# Altium PCB Preamp.PcbDoc
Units mil, origin at the board's own origin, x right, y up, seen from the top; angles counter-clockwise.
Board outline 1250 x 480 mil, 2 copper layers (Top Layer, Bottom Layer); 15 components, 14 nets, 56 pads, 55 vias.
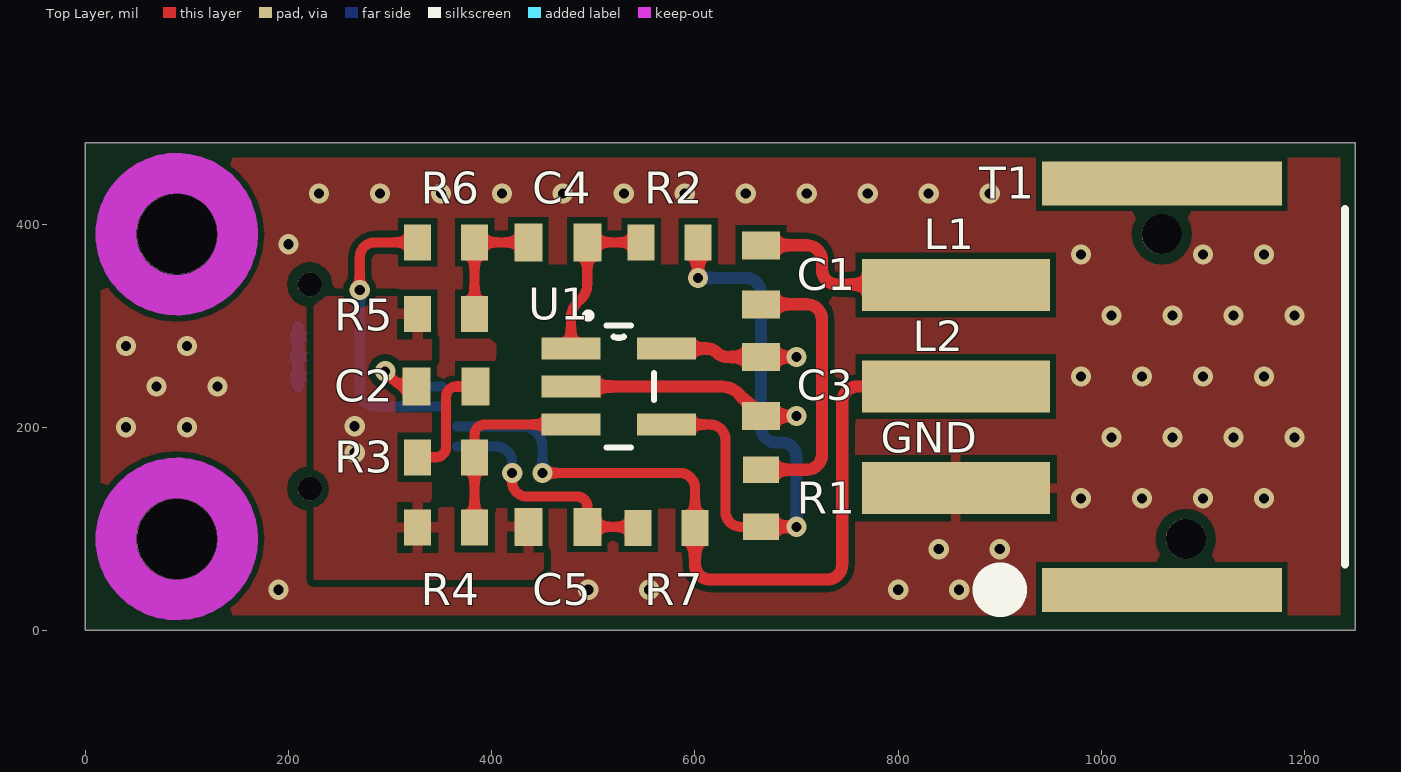
[diagram p0: Top Layer view]
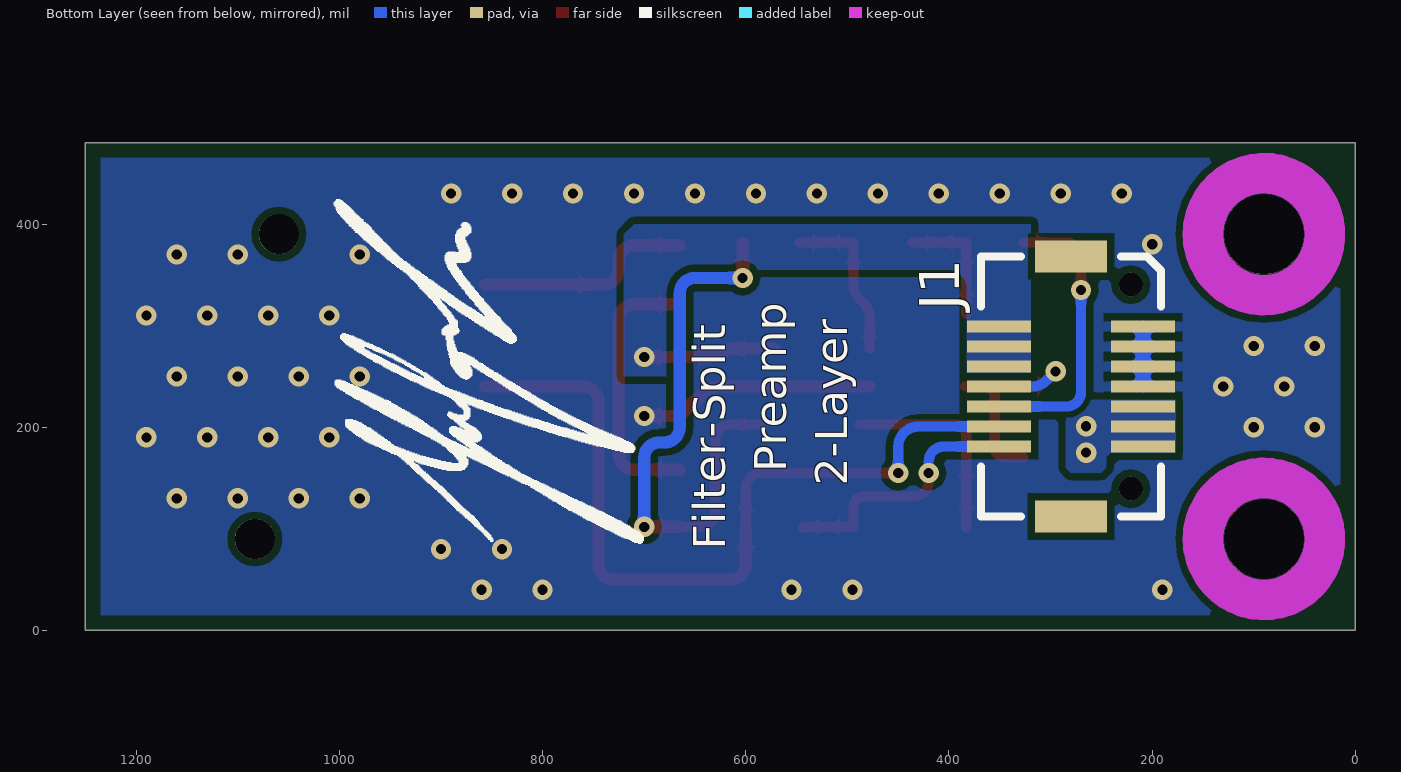
[diagram p1: Bottom Layer view, seen from below]
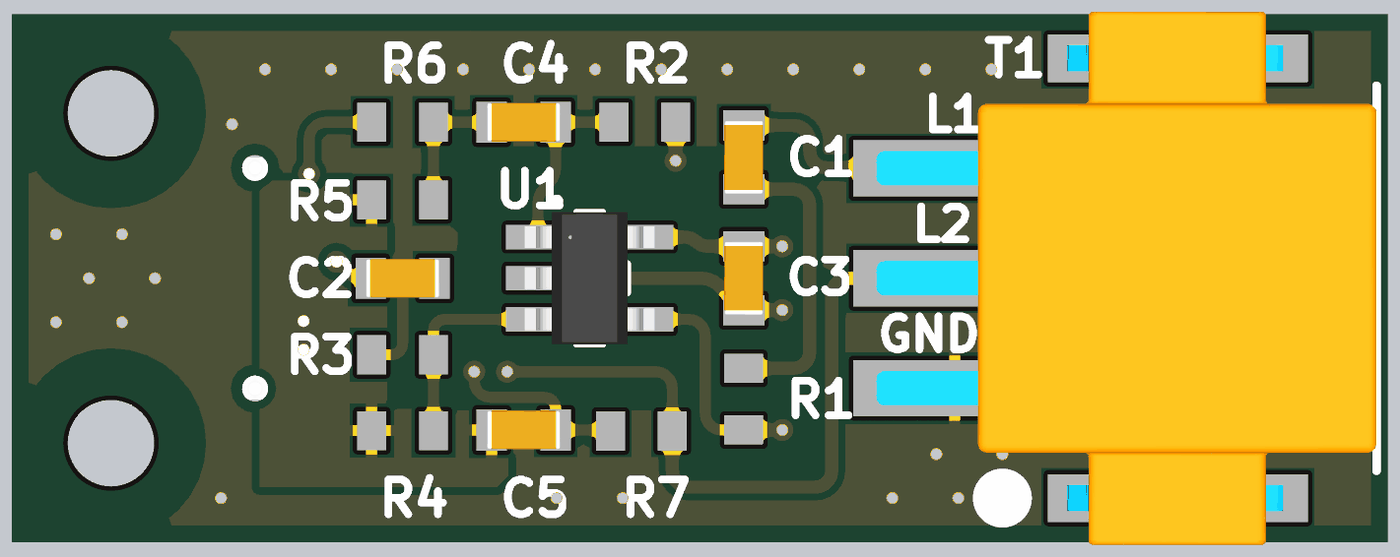
[diagram p2: 3D render of the assembled board from above, using the file's embedded part models]

## Layer stack, top to bottom
Top Solder: solder mask 0.4, Solder Resist, Dk 3.5
Top Layer: signal copper 1.4
Dielectric 1: dielectric 12.6, FR-4, Dk 4.8
Bottom Layer: signal copper 1.4
Bottom Solder: solder mask 0.4, Solder Resist, Dk 3.5

## Board outline
0,0 1250,0 1250,480 0,480

## Design rules (kind name [scope] priority, off if disabled: settings)
Clearance Clearance_3 [InNamedPolygon('BOTTOM_GND')] p1: gap=7 ignorepadtopadclearanceinfootprint=FALSE except(0: Arc-Hole Track-Hole SMDPad-Hole THPad-Hole Via-Hole Fill-Hole Poly-Hole Region-Hole Text-Hole)
Clearance Clearance_2 [InNamedPolygon('BOTTOM_V+')] p2: gap=7 ignorepadtopadclearanceinfootprint=FALSE except(0: Arc-Hole Track-Hole SMDPad-Hole THPad-Hole Via-Hole Fill-Hole Poly-Hole Region-Hole Text-Hole)
Clearance Clearance_1 [InNamedPolygon('TOP_VREF')] p3: gap=10 ignorepadtopadclearanceinfootprint=FALSE except(0: Arc-Hole Track-Hole SMDPad-Hole THPad-Hole Via-Hole Fill-Hole Poly-Hole Region-Hole Text-Hole; 7: Arc-Fill Arc-Poly Arc-Region Track-Fill Track-Poly Track-Region SMDPad-Fill SMDPad-Poly SMDPad-Region THPad-Fill THPad-Poly THPad-Region Via-Fill Via-Poly Via-Region Fill-Fill Fill-Poly Fill-Region Poly-Poly Poly-Region Region-Region)
Clearance [All] p4: gap=6 ignorepadtopadclearanceinfootprint=FALSE except(0: Arc-Text Arc-Hole Track-Text Track-Hole SMDPad-Text SMDPad-Hole THPad-Text THPad-Hole Via-Text Via-Hole Fill-Text Fill-Hole Poly-Text Poly-Hole Region-Text Region-Hole Text-Text Text-Hole; 5: SMDPad-SMDPad; 7: THPad-Via Via-Via; 10: THPad-THPad THPad-Fill THPad-Poly THPad-Region)
PolygonConnect PolygonConnect_5 [All vs IsNamedPolygon('BOTTOM_GND')] p1: thpad.connectstyle=Relief thpad.reliefconductorwidth=10 thpad.reliefentries=4 thpad.polygonreliefangle="90 Angle" thpad.airgapwidth=10 smdpad.connectstyle=Relief smdpad.reliefconductorwidth=10 smdpad.reliefentries=4 smdpad.polygonreliefangle="90 Angle" smdpad.airgapwidth=7 via.connectstyle=Direct via.reliefconductorwidth=10 via.reliefentries=4 via.polygonreliefangle="90 Angle" via.airgapwidth=10
PolygonConnect PolygonConnect_4 [All vs IsNamedPolygon('BOTTOM_GND')] p2: thpad.connectstyle=Relief thpad.reliefconductorwidth=10 thpad.reliefentries=4 thpad.polygonreliefangle="90 Angle" thpad.airgapwidth=10 smdpad.connectstyle=Relief smdpad.reliefconductorwidth=10 smdpad.reliefentries=4 smdpad.polygonreliefangle="90 Angle" smdpad.airgapwidth=7 via.connectstyle=Direct via.reliefconductorwidth=10 via.reliefentries=4 via.polygonreliefangle="90 Angle" via.airgapwidth=10
PolygonConnect PolygonConnect_3 [All vs IsNamedPolygon('TOP_GND')] p3: thpad.connectstyle=Relief thpad.reliefconductorwidth=10 thpad.reliefentries=4 thpad.polygonreliefangle="90 Angle" thpad.airgapwidth=10 smdpad.connectstyle=Relief smdpad.reliefconductorwidth=10 smdpad.reliefentries=4 smdpad.polygonreliefangle="90 Angle" smdpad.airgapwidth=7 via.connectstyle=Direct via.reliefconductorwidth=10 via.reliefentries=4 via.polygonreliefangle="90 Angle" via.airgapwidth=10
PolygonConnect PolygonConnect_2 [All vs IsNamedPolygon('TOP_VREF')] p4: thpad.connectstyle=Relief thpad.reliefconductorwidth=10 thpad.reliefentries=4 thpad.polygonreliefangle="90 Angle" thpad.airgapwidth=10 smdpad.connectstyle=Relief smdpad.reliefconductorwidth=10 smdpad.reliefentries=4 smdpad.polygonreliefangle="90 Angle" smdpad.airgapwidth=7 via.connectstyle=Direct via.reliefconductorwidth=10 via.reliefentries=4 via.polygonreliefangle="90 Angle" via.airgapwidth=10
PolygonConnect PolygonConnect_1 [All vs IsNamedPolygon('BOTTOM_VREF')] p5: thpad.connectstyle=Relief thpad.reliefconductorwidth=10 thpad.reliefentries=4 thpad.polygonreliefangle="90 Angle" thpad.airgapwidth=10 smdpad.connectstyle=Direct smdpad.reliefconductorwidth=10 smdpad.reliefentries=4 smdpad.polygonreliefangle="90 Angle" smdpad.airgapwidth=10 via.connectstyle=Direct via.reliefconductorwidth=10 via.reliefentries=4 via.polygonreliefangle="90 Angle" via.airgapwidth=10
PolygonConnect [All] p6: connectstyle=Direct reliefconductorwidth=20 reliefentries=4 polygonreliefangle="90 Angle" airgapwidth=10
RoutingVias [All] p1: holewidth=10 width=20 viastyle="Through Hole" minholewidth=10 minwidth=20 maxholewidth=28 maxwidth=50
SolderMaskExpansion [All] p1: expansion=4
Width [All] p1: maxlimit=50 minlimit=7 preferedwidth=10 minimp=50.000000 maximp=50.000000 favimp=50.000000
30 further rules are at their usual default settings.

## Components (designator, comment, footprint, x,y, rotation, side; value= is the part's Value field where it differs from the comment)
C1 "2200pF" CAPC1608X09N 665,350 r270 top
C2 "2200pF" CAPC1608X09N 355,240 r0 top
C3 "10nF" CAPC1608X09N 665,240 r90 top
C4 "1uF" CAPC1608X09N 465,381.95 r180 top
C5 "0.018uF" CAPC1608X09N 465,101.95 r0 top
J1 "CONN RECEPT 14POS" DF12(3.0)-14DS 280,240 r270 bottom
R1 "30K" RESC1608X06N 665,130 r270 top
R2 "150K" RESC1608X06N 575,381.95 r180 top
R3 "30K" RESC1608X06N 355,170.39 r0 top
R4 "150K" RESC1608X06N 355,101.36 r180 top
R5 "47K" RESC1608X06N 355,311.36 r0 top
R6 "10K" RESC1608X06N 355,381.95 r0 top value=10k
R7 "20K" RESC1608X06N 572,100.98 r180 top
T1 "TERM BLK HOR 3POS" "TERM BLK HOR 3POS" 1030,240 r270 top
U1 "OPA191" SOT23-5 525,240 r0 top

## Footprints (in the part's own frame and the unit in brackets; to place one, negate y for a bottom-side part, rotate by r counter-clockwise, add the part's x,y. Pads: shape width x height; smd on the part's side, far side on the other; paste and mask are expansions set on the pad)
CAPC1608X09N [mm] "Chip Capacitor, 2-Leads, Body 1.60x0.80mm, IPC Medium Density"
  rect 0.7x0.95 smd: 1(-0.737,0) 2(0.738,0)
  body extent -0.85,-0.45 0.85,0.45, height 0.8
DF12(3.0)-14DS [mm] "CONN RECEPT 14POS 3MM SMD 0.5MM"
  rect 0.3x1.6 smd mask+0.051: 1(-1.5,1.8) 2(-1,1.8) 3(-0.5,1.8) 4(0,1.8) 5(0.5,1.8) 6(1,1.8) 7(1.5,1.8) 8(1.5,-1.8) 9(1,-1.8) 10(0.5,-1.8) 11(0,-1.8) 12(-0.5,-1.8) 13(-1,-1.8) 14(-1.5,-1.8)
  rect 0.8x1.8 smd mask+0.102: ""(-3.25,0)
  round 0.6 hole 0.6 unplated mask+0: ""(-2.55,1.5) ""(2.55,1.5)
  rect 0.8x1.8 smd: ""(3.25,0)
  Multi-Layer region: -4,1
  silkscreen extent -3.25,-2.25 3.25,2.25, body extent -3.3,-2.3 3.3,2.3, height 2.19
RESC1608X06N [mm] "Chip Resistor, 2-Leads, Body 1.60x0.80mm, IPC Medium Density"
  rect 0.67x0.9 smd: 1(-0.713,0) 2(0.713,0)
  body extent -0.85,-0.45 0.85,0.45, height 0.55
SOT23-5 [mil]
  rect 58x22 smd: 1(-47,37.4) 2(-47,0) 3(-47,-37.4) 4(47,-37.4) 5(47,37.4)
  silkscreen extent -31,-60 34,71, body extent -59,-60 59,60, height 57
"TERM BLK HOR 3POS" [mm] "3 Position Wire to Board Terminal Block Horizontal with Board 0.100\" (2.54mm) Surface Mount"
  rect 1.3x4.7 smd: 1(2.54,-4.4) 2(0,-4.4) 3(-2.54,-4.4)
  rect 1.1x6 smd: ""(-5.08,0.75) ""(5.08,0.75)
  round 1 hole 1 mask+0: ""(-3.81,0.75) ""(3.81,1.35)
  silkscreen extent -4.45,-3.48 5.26,5.33, body extent -6.16,-6.22 6.16,5.33, height 4.95

## Part data
C1 C2: library part "CAP CER 2200pF 0603", Digikey Part Number=490-7768-1-ND, Manufacturer=Murata, Rating=C0G, Tolerance=1%, Voltage=50V
C3: library part "CAP CER 10nF 0603", "Bypass caps", Digikey Part Number=490-9666-1-ND, Manufacturer=Murata
C4: library part "CAP CER 1UF 25V X7R 0603", "1µF ±10% 25V Ceramic Capacitor X7R 0603 (1608 Metric)", Digikey Part Number=490-10673-1-ND, Package=0603, Rating=X7R, Tolerance=10%, Voltage=25V
C5: library part "CAP CER 0.018UF 35V NP0 0603", "CAP CER 0.018UF 35V NP0 0603", Digikey Part Number=445-174558-1-ND, Package=0603, Rating=NP0, Tolerance=5%, Voltage=35V
J1: library part DF12(3.0)-14DS-0.5V(86), "14 Position Connector Header, Outer Shroud Contacts Surface Mount Gold"
R1 R3: library part "RES SMD 30K OHM 1% 1/10W 0603", "RES SMD 30K OHM 1% 1/10W 0603", Digikey Part Number=311-30.0KHRCT-ND, Tolerance=1%, Type=RES
R2 R4: library part "RES SMD 150K 1% 1/10W 0603", "RES SMD 150K 1% 1/10W 0603", Digikey Part Number=311-150KHRCT-ND, Tolerance=1%, Type=RES
R5: library part "RES SMD 47K OHM 1% 1/10W 0603", "RES 47K 0603", Digikey Part Number=311-47.0KHRCT-ND, Tolerance=1%, Type=RES
R6: library part "RES SMD 10K OHM 1% 1/10W 0603", "RES SMD 10K OHM 1% 1/10W 0603", Digikey Part Number=311-10.0KHRCT-ND, Manufacturer=Yageo, Manufacturer Part Number=RC0603FR-0710KL, Power=0.1W, Temperature=155dC, Tolerance=1%, Type=RES
R7: library part "RES SMD 20K OHM 1% 1/10W 0603", "RES SMD 20K OHM 1% 1/10W 0603", Digikey Part Number=311-20.0KHRCT-ND, Tolerance=1%, Type=RES
T1: "3 Position Wire to Board Terminal Block Horizontal with Board 0.100\" (2.54mm) Surface Mount", Digikey Part Number=1195-3657-1-ND
U1: library part OPA191_SOT23

## Free pads (board coordinates)
  round 78.74 hole 78.74 unplated: ""(90,90) ""(90,390)

## Via types
v1: diameter 20, hole 10, Top Layer to Bottom Layer, tented both sides, 55 vias

## Nets (pads, with @x,y where several pads share a name; then routed paths per layer and width w, separated by ;. In a path a pad name is that pad's centre, name@x,y a point inside that pad or via, vN(x,y) a via of type N, cw(c..) or ccw(c..) an arc to the next point about the centre after c; other vN are vias at no path point)
GND: C3.1 J1.1 J1.2 J1.3 J1.4 T1.1 U1.2 | length 292.1
  Top Layer w12: U1.2 626.44,240 cw(c626.44,217) 642.7,233.26 C3.1 v1(700,210.97)
  Bottom Layer w12: J1.4 J1.3 J1.2 J1.1
  other v1: 190,40 495,40 555,40 800,40 860,40 840,80 900,80 980,130 1040,130 1100,130 1160,130 1010,190 1070,190 1130,190 1190,190 40,200 100,200 70,240 130,240 980,250 1040,250 1100,250 1160,250 40,280 100,280 1010,310 1070,310 1130,310 1190,310 980,370 1100,370 1160,370 200,380.06 230,430 290,430 350,430 410,430 470,430 530,430 590,430 650,430 710,430 770,430 830,430 890,430
NetC1_1: C1.1 T1.3 | length 217.7
  Top Layer w12: C1.1 710,379.04 cw(c710,364.04) 725,364.04 725,355.46 ccw(c740,355.46) 740,340.46 856.31,340.46 T1.3
NetC1_2: C1.2 R1.1 | length 270
  Top Layer w12: R1.1 710,158.05 ccw(c710,173.05) 725,173.05 725,305.96 ccw(c710,305.96) 710,320.96 C1.2
NetC2_2: C2.2 R3.1 | length 118.1
  Top Layer w10: R3.1 345,170.39 ccw(c345,180.39) 355,180.39 355,230 cw(c365,230) 365,240 C2.2
NetC4_1: C4.1 R2.2 U1.1 | length 162.4
  Top Layer w10: U1.1 478,308.07 cw(c498,308.07) 483.86,322.22 488.18,326.54 ccw(c474.04,340.68) 494.04,340.68 C4.1 R2.2
NetC4_2: C4.2 R5.2 R6.2 | length 123.5
  Top Layer w10: R5.2 R6.2 C4.2
NetR1_2: R1.2 R2.1 U1.4 | length 563.4
  Top Layer w10: U1.4@582,202.6 615,202.6 cw(c615,187.6) 630,187.6 630,116.95 ccw(c645,116.95) 645,101.95 R1.2
  Top Layer w12: v1(603.05,346.95) R2.1 ; R1.2 v1(700,101.95)
  Bottom Layer w12: v1(603.05,346.95) 650,346.95 cw(c650,331.95) 665,331.95 665,200 ccw(c680,200) 680,185 685,185 cw(c685,170) 700,170 v1(700,101.95)
NetR3_2: R3.2 R4.1 U1.3 | length 201.9
  Top Layer w10: R4.1 R3.2 383.05,192.6 cw(c393.05,192.6) 393.05,202.6 U1.3@488,202.6
OUT: J1.10 R6.1 | length 286.7
  Top Layer w10: v1(270,335) 270,366.95 cw(c285,366.95) 285,381.95 R6.1
  Bottom Layer w10: v1(270,335) 270,235 ccw(c284.69,235) 284.69,220.31 J1.10
SW_IN_1: J1.9 R7.1 T1.2 | length 797.2
  Top Layer w10: v1(450,155) 585.05,155 cw(c585.05,140) 600.05,140 R7.1
  Top Layer w12: R7.1 600.05,65 ccw(c615.05,65) 615.05,50 730,50 ccw(c730,65) 745,65 745,225 cw(c760,225) 760,240 T1.2
  Bottom Layer w10: J1.9@365.87,200.63 430.02,200.63 cw(c430.02,180.65) 450,180.65 v1(450,155)
SW_IN_2: C5.2 J1.8 R7.2 | length 240.3
  Top Layer w10: v1(420,155) 420,146.65 ccw(c435,146.65) 435,131.65 484.04,131.65 cw(c484.04,121.65) 494.04,121.65 C5.2 542.98,101.95 R7.2
  Bottom Layer w10: J1.8@365.87,180.94 405,180.94 cw(c405,165.94) 420,165.94 v1(420,155)
SW_OUT: C2.1 J1.11 | length 97.5
  Top Layer w10: v1(295,255) 304.14,245.86 ccw(c318.28,260) 318.28,240 C2.1
  Bottom Layer w10: v1(295,255) 304.14,245.86 ccw(c318.28,260) 318.28,240 J1.11
V+: C3.2 J1.12 J1.13 J1.14 U1.5 | length 130.2
  Top Layer w12: U1.5 611.98,277.4 cw(c611.98,263.84) 621.57,273.43 ccw(c632.18,284.04) 632.18,269.04 C3.2 v1(700,269.04)
VREF: C5.1 J1.5 J1.6 J1.7 R4.2 R5.1
  other v1: 265,175 265,201
pads on no net: J1. T1.

## Polygon pours and split planes (outlines as drawn)
GND on Bottom Layer "BOTTOM_GND" (solid, remove dead copper, pour order 16): 15,465 1235,465 1235,15 15,15
V+ on Bottom Layer "BOTTOM_V+" (solid, pour order 4): 319.37,253.78 319.37,400 710,400 720,390 720,250 670,250 670,345 660,355 400,355 ccw(c400,337.36) 382.36,337.36 382.36,253.78
VREF on Bottom Layer "BOTTOM_VREF" (solid, pour order 6): 177,227 285,227 285,160 280,155 250,155 245,160 245,170.63 240.63,175 177,175
GND on Top Layer "TOP_GND" (solid, remove dead copper, pour order 14): 15,465 1235,465 1235,15 15,15
VREF on Top Layer "TOP_VREF" (solid, pour order 12): 341,329 341,130 350,121 451,121 451,60 441,50 225,50 225,319 235,329

## Keep-outs
Top Layer:
  circle w40: c90,90 r60
  circle w40: c90,390 r60
Bottom Layer:
  circle w40: c90,90 r60
  circle w40: c90,390 r60

## Other copper
Top Layer:
  pour cut-out: 405,360 715,360 715,120 405,120

## Silkscreen, mask and mechanical layers (free items; w line width, h text height)
Top Overlay:
  text "L1" at 825,375 h30
  text "L2" at 814.5,275 h30
  text "GND" at 783.02,175 h30
Bottom Overlay:
  region: 4245 vertices and 4 holes, not listed, extent 700.3,85.3 1005.66,424.29
  text "Preamp" at 560,155.68 h31.5 r270
  text "2-Layer" at 500,142.56 h31.5 r270
  text "Filter-Split" at 620,79.59 h31.5 r270
Outline:
  the board outline again, w10
Mechanical 13:
  circle w2: c90,390 r80
  circle w2: c90,90 r80
  circle w10: c90,90 r51.38
  circle w10: c90,390 r51.38